# Altium PCB PCB1.PcbDoc
Units mil, origin at the board's own origin, x right, y up, seen from the top; angles counter-clockwise.
Board outline 1771.65 x 1181.1 mil, 2 copper layers (Top Layer, Bottom Layer); 5 components, 6 nets, 21 pads, 0 vias.
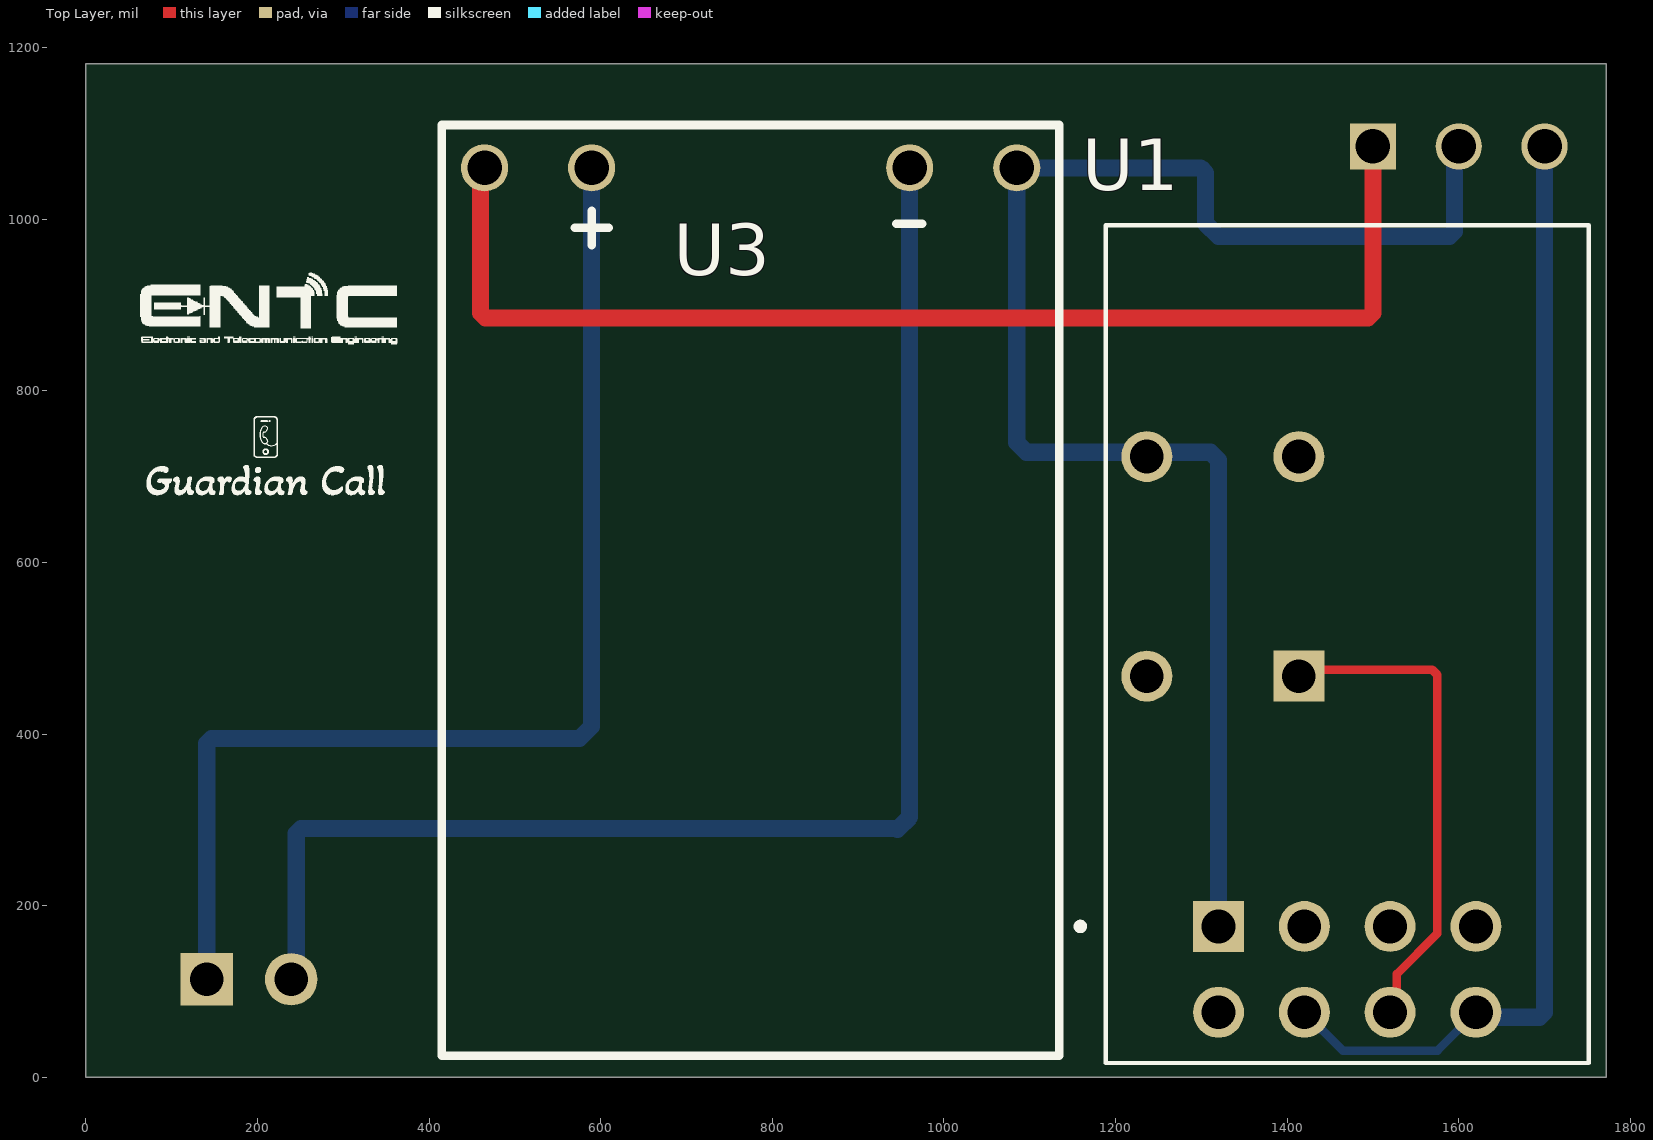
[diagram p0: Top Layer view]
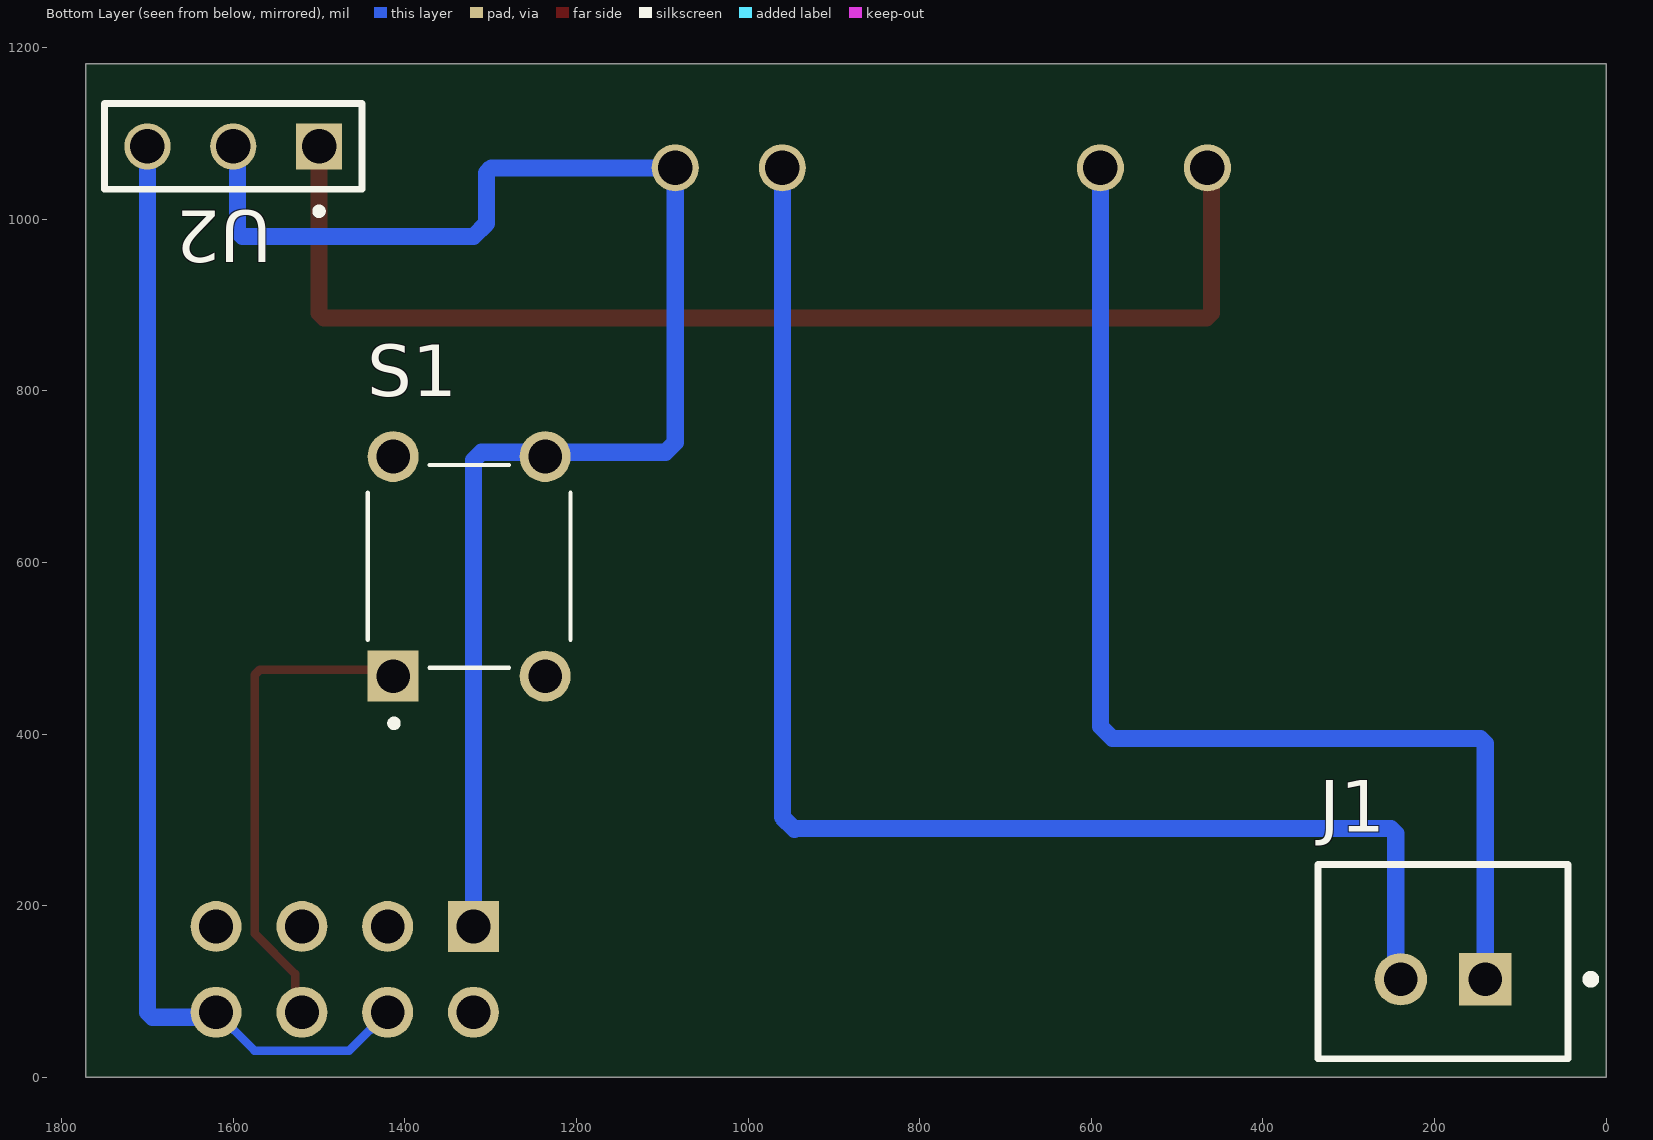
[diagram p1: Bottom Layer view, seen from below]

## Layer stack, top to bottom
Top Solder: solder mask 0.4, Solder Resist, Dk 3.5
Top Layer: signal copper 1.4
Dielectric 1: dielectric 12.6, FR-4, Dk 4.8
Bottom Layer: signal copper 1.4
Bottom Solder: solder mask 0.4, Solder Resist, Dk 3.5

## Board outline
0,0 0,1181.1 1771.65,1181.1 1771.65,0

## Design rules (kind name [scope] priority, off if disabled: settings)
AssemblyTestpoint [All] p1: testpointundercomponent=TRUE minsize=40 maxsize=100 preferedsize=60 minholesize=0 maxholesize=40 preferedholesize=32 testpointgrid=1 usegrid=TRUE gridoriginx=-1160 gridoriginy=-340 gridtolerance=0.01 allowsidetop=TRUE allowsidebottom=TRUE
Clearance Clearance_1 [OnMid vs OnMid] p1: gap=10 ignorepadtopadclearanceinfootprint=FALSE sourcerule=37 cellrowname=All cellrowtype=0 cellcolname=All cellcoltype=0 innerlayers=TRUE
Clearance Clearance_2 [(ExistsOnLayer('Top Layer') Or ExistsOnLayer('Bottom Layer')) vs (ExistsOnLayer('Top Layer') Or ExistsOnLayer('Bottom Layer'))] p2: gap=10 ignorepadtopadclearanceinfootprint=FALSE sourcerule=37 cellrowname=All cellrowtype=0 cellcolname=All cellcoltype=0 outerlayers=TRUE
Clearance [All] p3: gap=10 ignorepadtopadclearanceinfootprint=FALSE ismatrix=TRUE
FabricationTestpoint [All] p1: side=3 testpointundercomponent=TRUE minsize=40 maxsize=100 preferedsize=60 minholesize=0 maxholesize=40 preferedholesize=32 testpointgrid=1 allowsidetop=TRUE allowsidebottom=TRUE usegrid=TRUE gridoriginx=-1160 gridoriginy=-340 gridtolerance=0.01
PolygonConnect [All] p1: connectstyle=Relief reliefconductorwidth=10 reliefentries=4 polygonreliefangle="90 Angle" airgapwidth=10
RoutingVias [All] p1: holewidth=28 width=50 viastyle="Through Hole" minholewidth=28 minwidth=50 maxholewidth=28 maxwidth=50
SolderMaskExpansion [All] p1: expansion=4 istentingtop=FALSE
Width MaxMinWidth_1 [All] p1: maxlimit=50 minlimit=10 preferedwidth=10 minimp=50.000000 maximp=50.000000 favimp=50.000000
Width [All] p2: maxlimit=10 minlimit=10 preferedwidth=10
28 further rules are at their usual default settings.

## Classes and differential pairs
component class Sheet1: J1 S1 U2

## Components (designator, comment, footprint, x,y, rotation, side; value= is the part's Value field where it differs from the comment)
J1 "battery connector" "battery connector" 195,130 r0 bottom
S1 "button" button 1320,590.55 r90 bottom
U1 "esp 01s" "esp 01s" 1540,410 r0 top
U2 "power module" "power module" 1600,1090 r90 bottom
U3 "charging module" "charging module" 464.53,1060 r0 top

## Footprints (in the part's own frame and the unit in brackets; to place one, negate y for a bottom-side part, rotate by r counter-clockwise, add the part's x,y. Pads: shape width x height; smd on the part's side, far side on the other; paste and mask are expansions set on the pad)
"battery connector" [mm]
  rect 1.55x1.55 hole 1 paste-2539.97 mask+0: 1(-1.377,0.398)
  round 1.55 hole 1 paste-2539.97 mask+0: 2(1.123,0.398)
  silkscreen extent -4.63,-3 3.57,2.75, body extent -3.83,-3 3.57,2.75, height 7
button [mm]
  rect 1.508x1.508 / inner round 1.508 / far side rect 1.508x1.508 hole 1: 1(-3.123,2.377)
  round 1.508 hole 1: 2(3.377,2.377) 3(-3.123,-2.123) 4(3.377,-2.123)
  silkscreen extent -4.62,-2.87 3.13,3.13
"charging module" [mm]
  round 1.395 hole 1.02: 1(0,0) 2(3.17,0) 3(12.585,0) 4(15.755,0)
  silkscreen extent -1.27,-26.29 17.02,1.27
"esp 01s" [mil]
  rect 59.37x59.37 / inner round 59.37 / far side rect 59.37x59.37 hole 39.37: 1(-220,-234.13)
  round 59.37 hole 39.37: 2(-120,-234.13) 3(-20,-234.13) 4(80,-234.13) 5(80,-334.13) 6(-20,-334.13) 7(-120,-334.13) 8(-220,-334.13)
  silkscreen extent -385,-393 211,583, body extent -353,-391 213,581, height 256
"power module" [mm]
  rect 1.37x1.37 / inner round 1.37 / far side rect 1.37x1.37 hole 1.02: 01(-0.127,-2.54)
  round 1.37 hole 1.02: 02(-0.127,0) 03(-0.127,2.54)
  silkscreen extent -2.15,-3.81 1.14,3.81

## Nets (pads, with @x,y where several pads share a name; then routed paths per layer and width w, separated by ;. In a path a pad name is that pad's centre, name@x,y a point inside that pad or via, vN(x,y) a via of type N, cw(c..) or ccw(c..) an arc to the next point about the centre after c; other vN are vias at no path point)
NetJ1_1: J1.1 U3.2 | length 1382.8
  Bottom Layer w20: J1.1 140.79,389.14 146.65,395 575,395 575.19,394.81 589.33,408.95 U3.2
NetJ1_2: J1.2 U3.3 | length 1652.6
  Bottom Layer w20: J1.2 245,120.12 245,284.14 250.86,290 945,290 945.86,289.14 960,303.28 U3.3
NetS1_1: S1.1 U1.6 | length 580.9
  Top Layer w10: S1.1@1413.58,472.6 1415.98,475 1569.14,475 1575,469.14 1575,167.67 1527.88,120.55 1527.88,83.75 U1.6
NetS1_4: S1.4 U1.1 U2.02 U3.4 | length 1788.8
  Bottom Layer w20: U1.1 1320,719.14 1310.64,728.5 1096.1,728.5 1084.8,739.8 U3.4 1299.14,1060 1305,1054.14 1305,995 1320,980 1589.14,980 1595,985.86 1595,1080 U2.02
NetU1_5: U1.5 U1.7 U2.03 | length 1331
  Bottom Layer w10: U1.7 1464.69,31.18 1575.31,31.18 U1.5
  Bottom Layer w20: U1.5 1625.87,70 1694.14,70 1700,75.86 U2.03
NetU2_01: U2.01 U3.1 | length 1410
  Top Layer w20: U3.1 460,1055.47 460,890.86 465.86,885 1494.14,885 1500,890.86 U2.01
pads on no net: S1.2 S1.3 U1.2 U1.3 U1.4 U1.8

## Silkscreen, mask and mechanical layers (free items; w line width, h text height)
Top Overlay:
  drawing of 57 lines, arcs and shapes, not listed
Mechanical 1:
  the board outline again, w10